# Altium PCB PCB1.PcbDoc
Units mm, origin at the board's own origin, x right, y up, seen from the top; angles counter-clockwise.
Board outline 53.21 x 63.75 mm, 2 copper layers (Top Layer, Bottom Layer); 5 components, 10 nets, 54 pads, 2 vias.
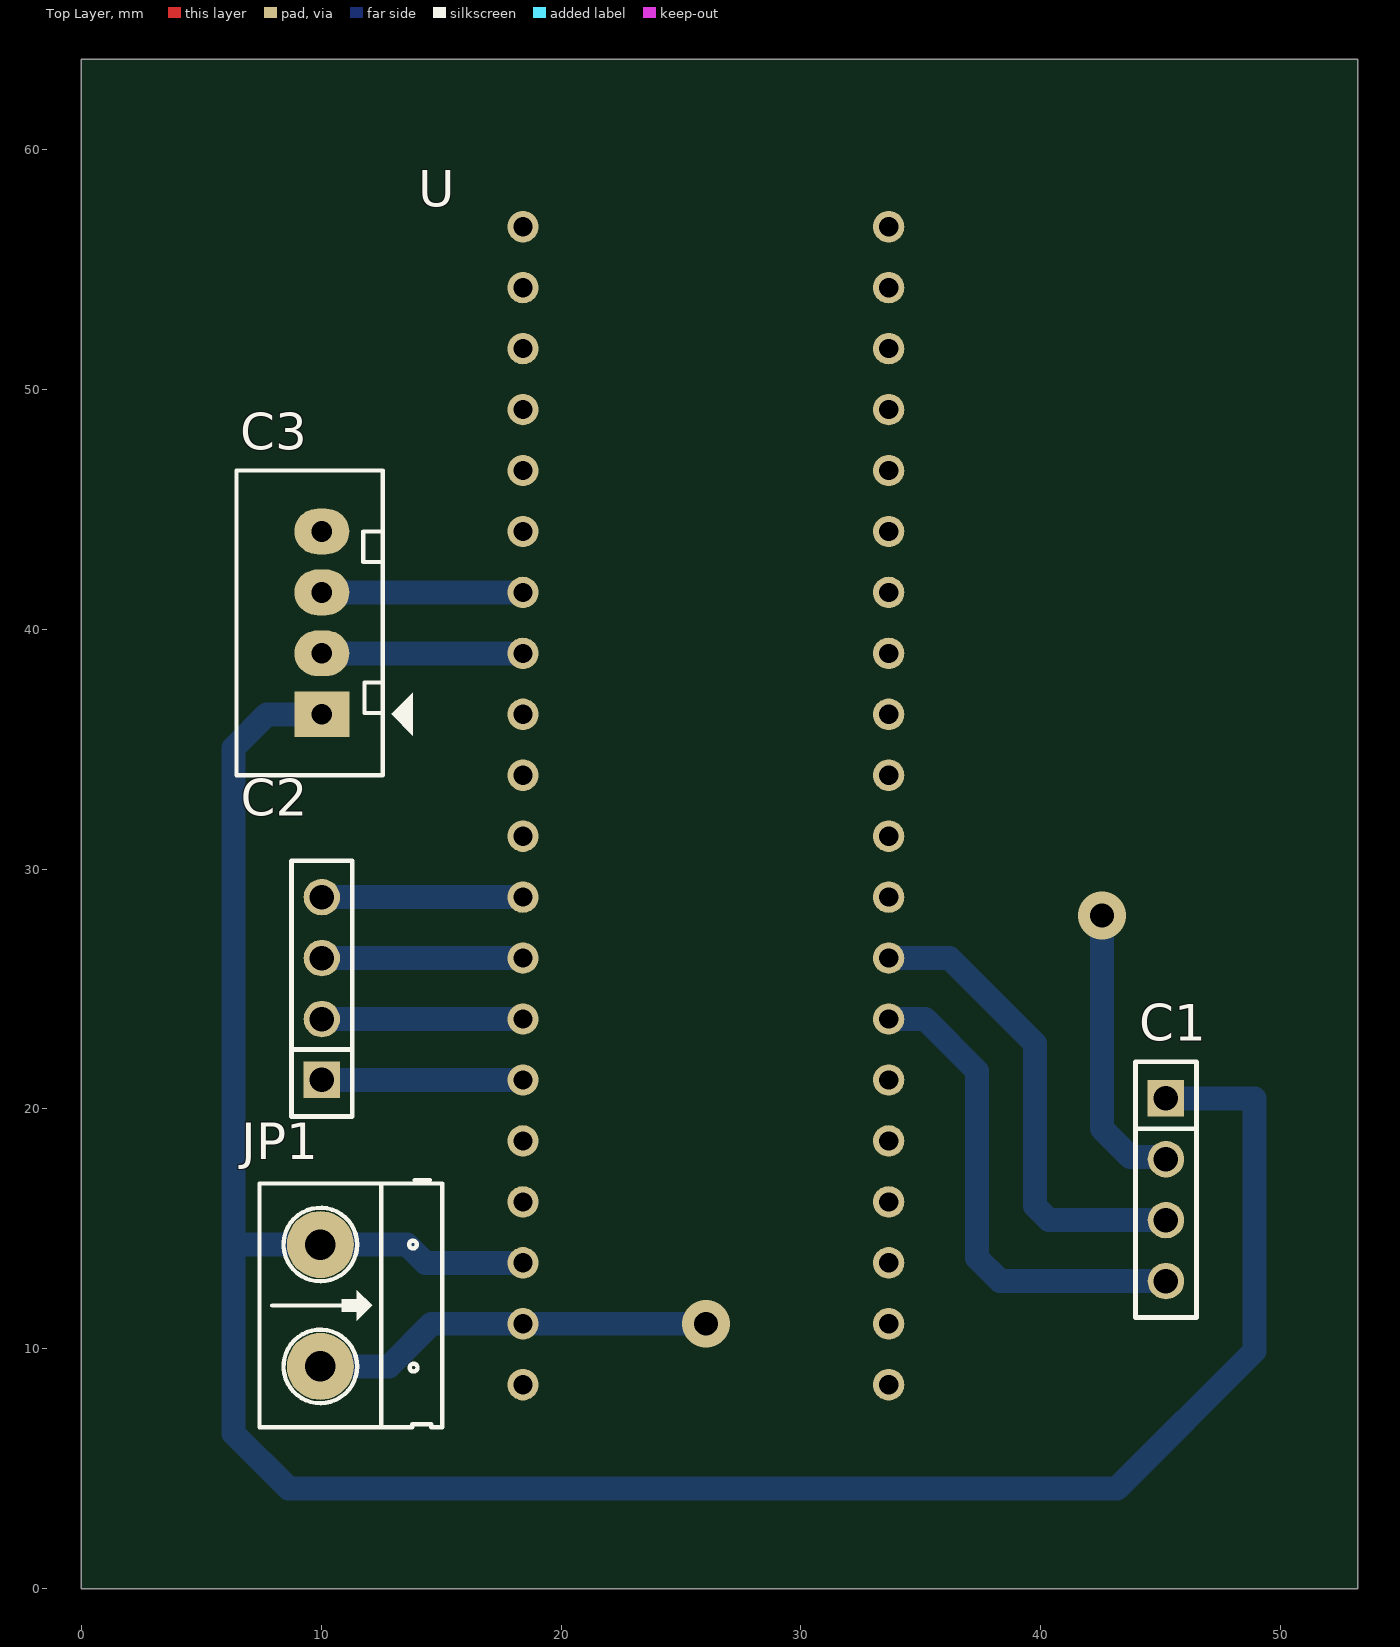
[diagram p0: Top Layer view]
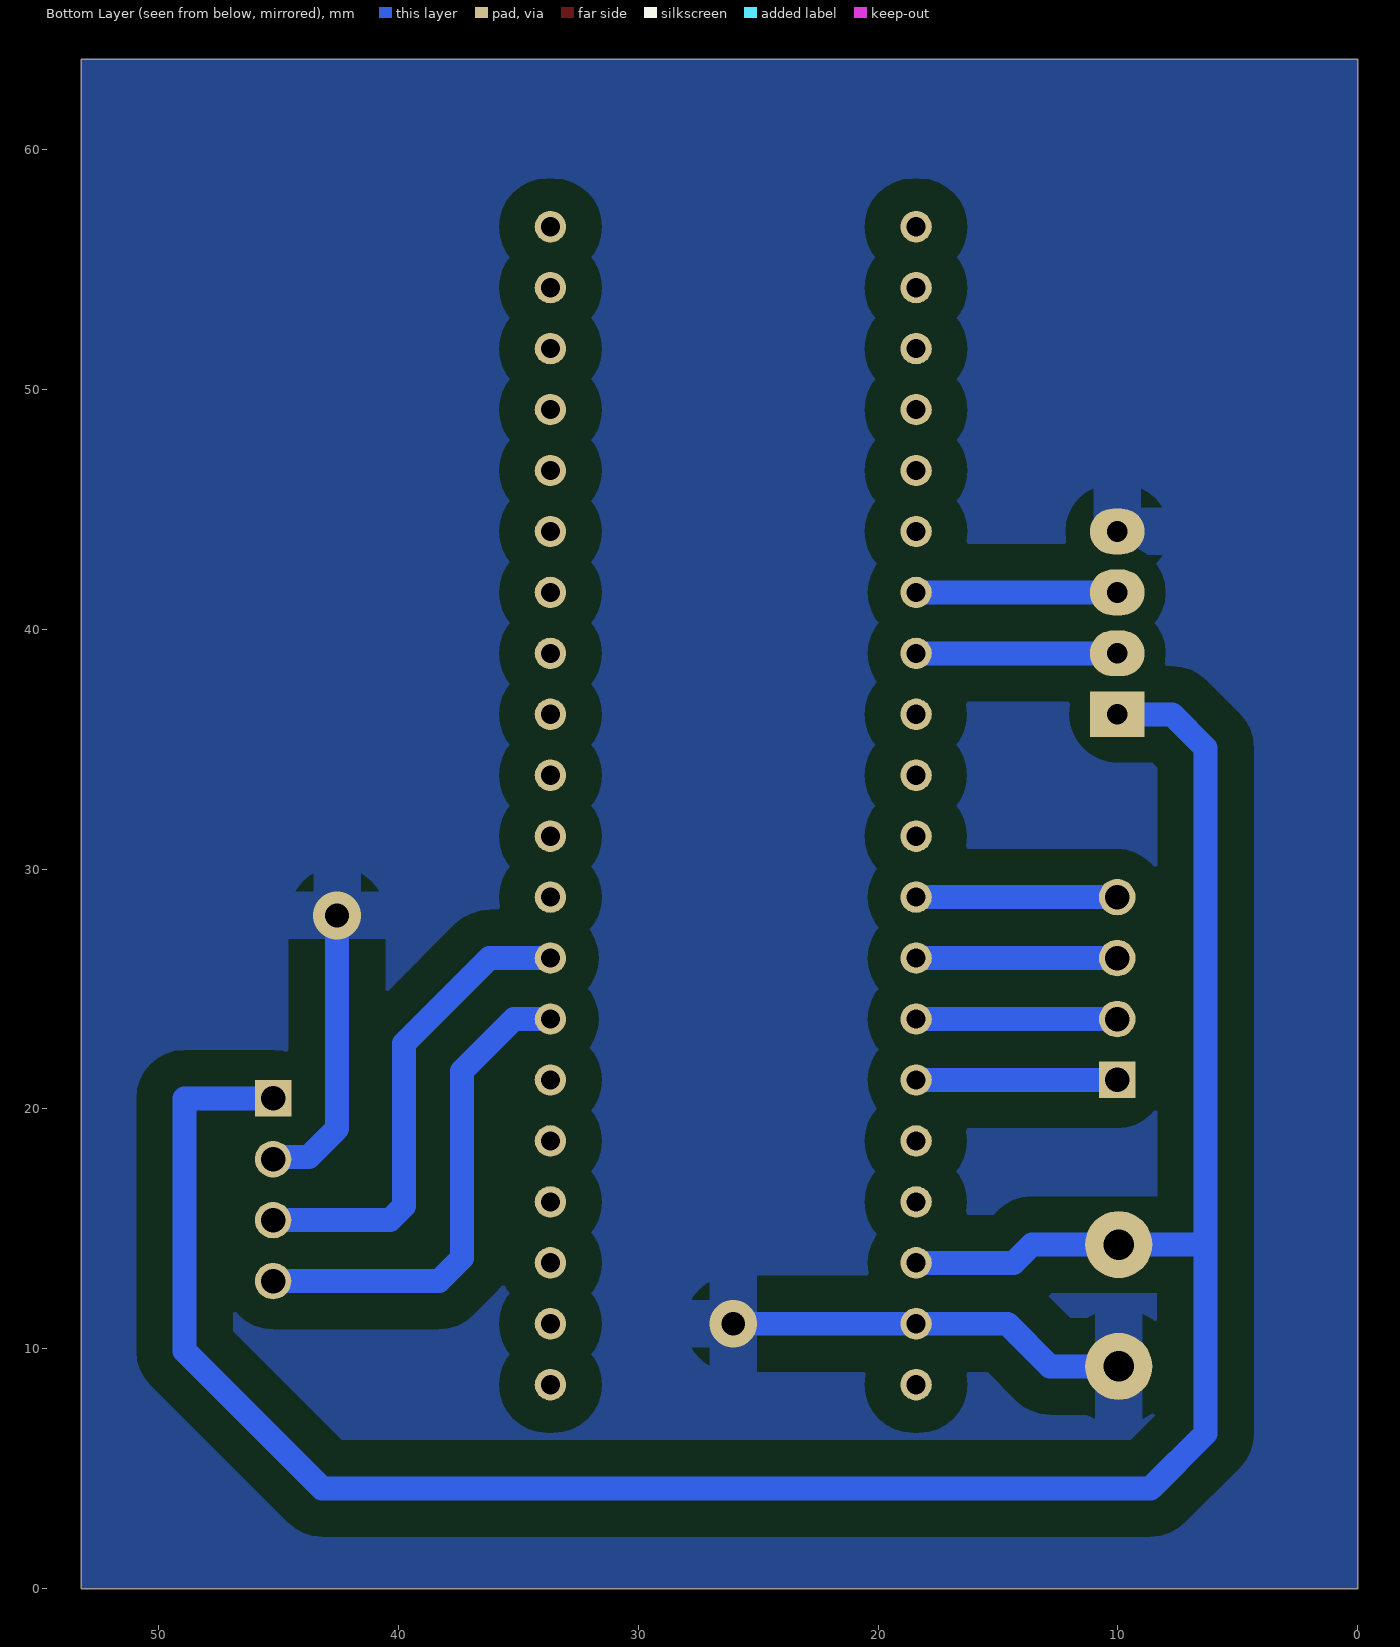
[diagram p1: Bottom Layer view, seen from below]
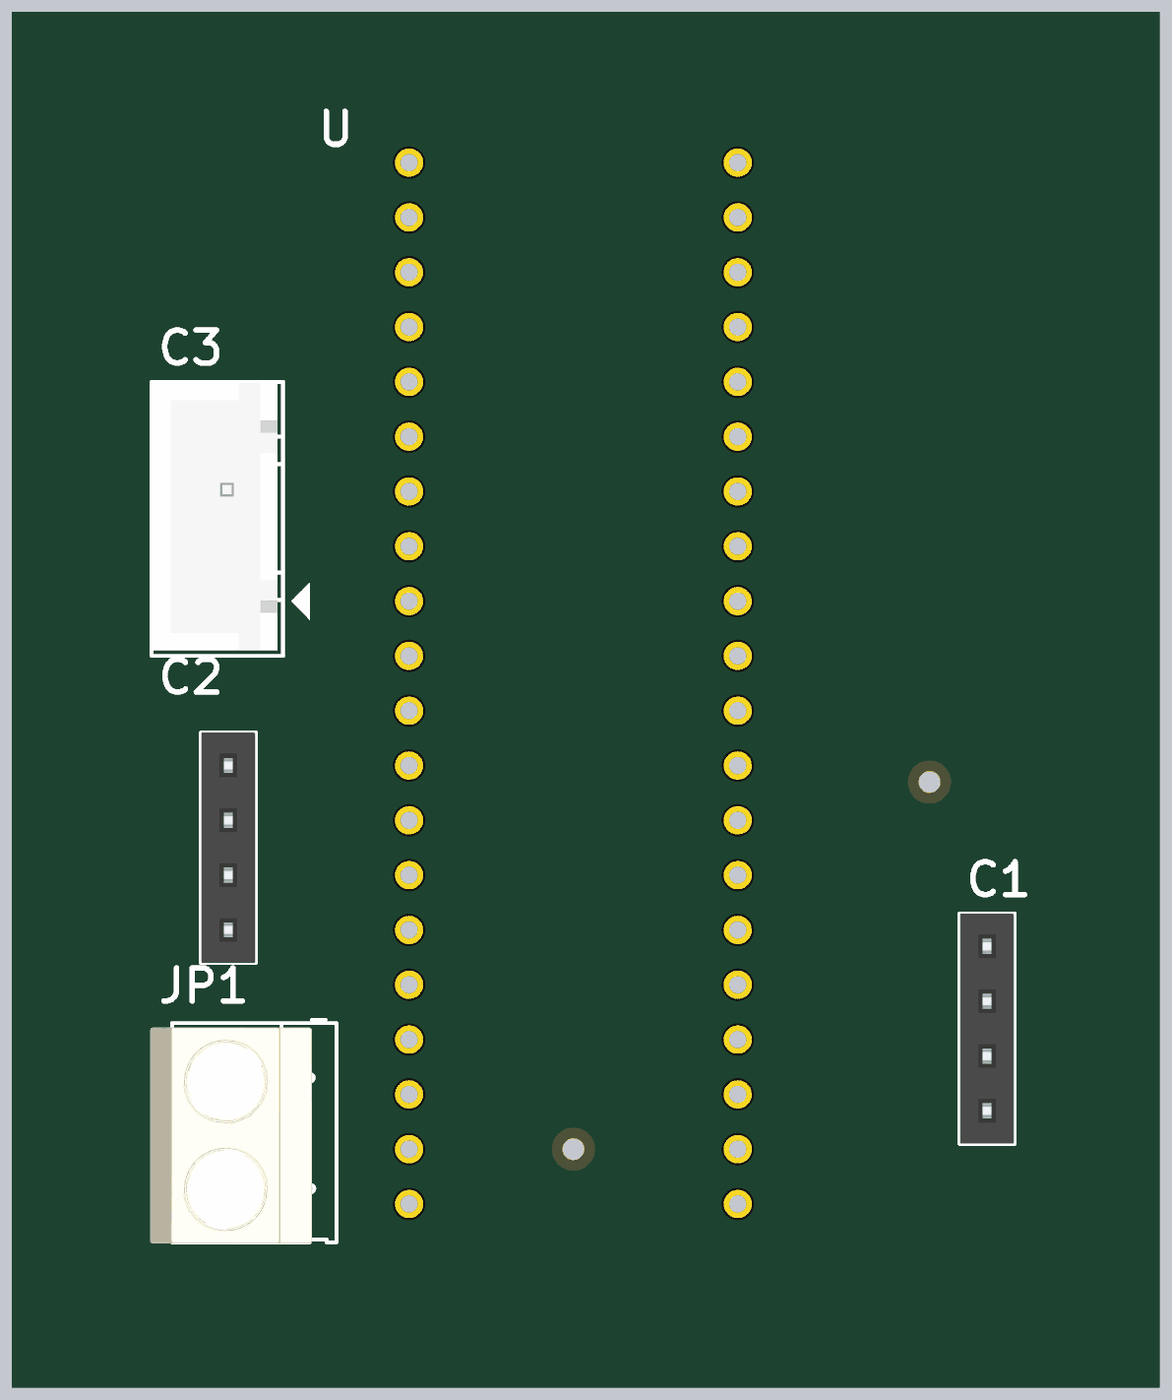
[diagram p2: 3D render of the assembled board from above, using the file's embedded part models]

## Layer stack, top to bottom
Top Solder: solder mask 0.0102, Solder Resist, Dk 3.5
Top Layer: signal copper 0.0356
Dielectric 1: dielectric 0.32, FR-4, Dk 4.8
Bottom Layer: signal copper 0.0356
Bottom Solder: solder mask 0.0102, Solder Resist, Dk 3.5

## Board outline
0,0 53.213,0 53.213,63.754 0,63.754

## Design rules (kind name [scope] priority, off if disabled: settings)
Clearance Clearance_9 [InNamedPolygon('Bottom Layer-No Net')] p1: gap=0.254 ignorepadtopadclearanceinfootprint=FALSE except(0: Arc-Hole Track-Hole SMDPad-Hole THPad-Hole Via-Hole Fill-Hole Poly-Hole Region-Hole Text-Hole; 1.5: Arc-Fill Arc-Poly Arc-Region Track-Fill Track-Poly Track-Region Via-Fill Via-Poly Via-Region Fill-Fill Fill-Poly Fill-Region Poly-Poly Poly-Region Region-Region)
Clearance Clearance_8 [InNamedPolygon('Bottom Layer-No Net')] p2: gap=0.254 ignorepadtopadclearanceinfootprint=FALSE except(0: Arc-Hole Track-Hole SMDPad-Hole THPad-Hole Via-Hole Fill-Hole Poly-Hole Region-Hole Text-Hole; 1.5: Arc-Fill Arc-Poly Arc-Region Track-Fill Track-Poly Track-Region Fill-Fill Fill-Poly Fill-Region Poly-Poly Poly-Region Region-Region)
Clearance Clearance_7 [InNamedPolygon('Bottom Layer-No Net')] p3: gap=0.254 ignorepadtopadclearanceinfootprint=FALSE except(0: Arc-Hole Track-Hole SMDPad-Hole THPad-Hole Via-Hole Fill-Hole Poly-Hole Region-Hole Text-Hole; 1.5: Arc-Fill Arc-Poly Arc-Region Track-Fill Track-Poly Track-Region Via-Fill Via-Poly Via-Region Fill-Fill Fill-Poly Fill-Region Poly-Poly Poly-Region Region-Region)
Clearance Clearance_6 [InNamedPolygon('Bottom Layer-No Net')] p4: gap=0.254 ignorepadtopadclearanceinfootprint=FALSE except(0: Arc-Hole Track-Hole SMDPad-Hole THPad-Hole Via-Hole Fill-Hole Poly-Hole Region-Hole Text-Hole; 1.5: Arc-Fill Arc-Poly Arc-Region Track-Fill Track-Poly Track-Region Via-Fill Via-Poly Via-Region Fill-Fill Fill-Poly Fill-Region Poly-Poly Poly-Region Region-Region)
Clearance Clearance_5 [InNamedPolygon('Bottom Layer-No Net')] p5: gap=0.254 ignorepadtopadclearanceinfootprint=FALSE except(0: Arc-Hole Track-Hole SMDPad-Hole THPad-Hole Via-Hole Fill-Hole Poly-Hole Region-Hole Text-Hole; 1.5: Arc-Fill Arc-Poly Arc-Region Track-Fill Track-Poly Track-Region Via-Fill Via-Poly Via-Region Fill-Fill Fill-Poly Fill-Region Poly-Poly Poly-Region Region-Region)
Clearance Clearance_4 [InNamedPolygon('Bottom Layer-No Net')] p6: gap=0.254 ignorepadtopadclearanceinfootprint=FALSE except(0: Arc-Hole Track-Hole SMDPad-Hole THPad-Hole Via-Hole Fill-Hole Poly-Hole Region-Hole Text-Hole; 0.5: Arc-Fill Arc-Poly Arc-Region Track-Fill Track-Poly Track-Region Via-Fill Via-Poly Via-Region Fill-Fill Fill-Poly Fill-Region Poly-Poly Poly-Region Region-Region)
Clearance Clearance_3 [InNamedPolygon('Bottom Layer-No Net')] p7: gap=0.254 ignorepadtopadclearanceinfootprint=FALSE except(0: Arc-Hole Track-Hole SMDPad-Hole THPad-Hole Via-Hole Fill-Hole Poly-Hole Region-Hole Text-Hole; 0.5: Arc-Fill Arc-Poly Arc-Region Track-Fill Track-Poly Track-Region Via-Fill Via-Poly Via-Region Fill-Fill Fill-Poly Fill-Region Poly-Poly Poly-Region Region-Region)
Clearance Clearance_2 [InNamedPolygon('Bottom Layer-No Net')] p8: gap=0.254 ignorepadtopadclearanceinfootprint=FALSE except(0: Arc-Hole Track-Hole SMDPad-Hole THPad-Hole Via-Hole Fill-Hole Poly-Hole Region-Hole Text-Hole; 0.5: Arc-Fill Arc-Poly Arc-Region Track-Fill Track-Poly Track-Region Via-Fill Via-Poly Via-Region Fill-Fill Fill-Poly Fill-Region Poly-Poly Poly-Region Region-Region)
Clearance Clearance_1 [InNamedPolygon('Bottom Layer-No Net')] p9: gap=0.254 ignorepadtopadclearanceinfootprint=FALSE except(0: Arc-Hole Track-Hole SMDPad-Hole THPad-Hole Via-Hole Fill-Hole Poly-Hole Region-Hole Text-Hole; 0.5: Arc-Fill Arc-Poly Arc-Region Track-Fill Track-Poly Track-Region Via-Fill Via-Poly Via-Region Fill-Fill Fill-Poly Fill-Region Poly-Poly Poly-Region Region-Region)
Clearance [All] p10: gap=0.254 ignorepadtopadclearanceinfootprint=FALSE except(0: Arc-Hole Track-Hole SMDPad-Hole THPad-Hole Via-Hole Fill-Hole Poly-Hole Region-Hole Text-Hole)
PolygonConnect PolygonConnect_11 [All vs IsNamedPolygon('Bottom Layer-No Net')] p1: connectstyle=Relief reliefconductorwidth=2 reliefentries=4 polygonreliefangle="90 Angle" airgapwidth=1
PolygonConnect PolygonConnect_10 [All vs IsNamedPolygon('Bottom Layer-No Net')] p2: connectstyle=Relief reliefconductorwidth=2 reliefentries=4 polygonreliefangle="90 Angle" airgapwidth=1
PolygonConnect PolygonConnect_9 [All vs IsNamedPolygon('Bottom Layer-No Net')] p3: connectstyle=Relief reliefconductorwidth=0.254 reliefentries=4 polygonreliefangle="90 Angle" airgapwidth=1
PolygonConnect PolygonConnect_8 [All vs IsNamedPolygon('Bottom Layer-No Net')] p4: connectstyle=Relief reliefconductorwidth=2 reliefentries=4 polygonreliefangle="90 Angle" airgapwidth=1
PolygonConnect PolygonConnect_7 [All vs IsNamedPolygon('Bottom Layer-No Net')] p5: connectstyle=Relief reliefconductorwidth=2 reliefentries=4 polygonreliefangle="90 Angle" airgapwidth=1
PolygonConnect PolygonConnect_6 [All vs IsNamedPolygon('Bottom Layer-No Net')] p6: connectstyle=Relief reliefconductorwidth=2 reliefentries=4 polygonreliefangle="90 Angle" airgapwidth=1
PolygonConnect PolygonConnect_5 [All vs IsNamedPolygon('Bottom Layer-No Net')] p7: connectstyle=Relief reliefconductorwidth=2 reliefentries=4 polygonreliefangle="90 Angle" airgapwidth=1
PolygonConnect PolygonConnect_4 [All vs IsNamedPolygon('Bottom Layer-No Net')] p8: connectstyle=Relief reliefconductorwidth=2 reliefentries=4 polygonreliefangle="90 Angle" airgapwidth=1
PolygonConnect PolygonConnect_3 [All vs IsNamedPolygon('Bottom Layer-No Net')] p9: connectstyle=Relief reliefconductorwidth=2 reliefentries=4 polygonreliefangle="90 Angle" airgapwidth=1
PolygonConnect PolygonConnect_2 [All vs IsNamedPolygon('Bottom Layer-No Net')] p10: connectstyle=Relief reliefconductorwidth=0.254 reliefentries=4 polygonreliefangle="90 Angle" airgapwidth=1
PolygonConnect PolygonConnect_1 [All vs IsNamedPolygon('Bottom Layer-No Net')] p11: connectstyle=Relief reliefconductorwidth=2 reliefentries=4 polygonreliefangle="90 Angle" airgapwidth=1
PolygonConnect [All] p12: connectstyle=Relief reliefconductorwidth=0.254 reliefentries=4 polygonreliefangle="90 Angle" airgapwidth=0.254
RoutingVias [All] p1: holewidth=0.711 width=1.27 viastyle="Through Hole" minholewidth=0.711 minwidth=1.27 maxholewidth=0.711 maxwidth=1.27
SolderMaskExpansion [All] p1: expansion=0.102
Width [All] p1: maxlimit=2 minlimit=0.254 preferedwidth=1 toplayer_maxwidth=0.254 toplayer_prefwidth=0.254 bottomlayer_minwidth=0.5 minimp=50.000000 maximp=50.000000 favimp=50.000000
30 further rules are at their usual default settings.

## Components (designator, comment, footprint, x,y, rotation, side; value= is the part's Value field where it differs from the comment)
C1 "JP4" JP4-C1T 45.212,20.447 r270 top
C2 "JP4" JP4-C1T 10.033,21.209 r90 top
C3 "Header4" Header4 10.033,36.449 r90 top
JP1 "Header 2_1" HED2 9.97,14.351 r270 top value="Header 2"
U "BLUE_PILL" BLUE_PILL 26.035,41.529 r0 top

## Footprints (in the part's own frame and the unit in brackets; to place one, negate y for a bottom-side part, rotate by r counter-clockwise, add the part's x,y. Pads: shape width x height; smd on the part's side, far side on the other; paste and mask are expansions set on the pad)
BLUE_PILL [mil]
  round 51.5 / inner round 60 / far side round 51.5 hole 31.5: P$1(-300,600) P$2(-300,500) P$3(-300,400) P$4(-300,300) P$5(-300,200) P$6(-300,100) P$7(-300,0) P$8(-300,-100) P$9(-300,-200) P$10(-300,-300) P$11(-300,-400) P$12(-300,-500) P$13(-300,-600) P$14(-300,-700) P$15(-300,-800) P$16(-300,-900) P$17(-300,-1000) P$18(-300,-1100) P$19(-300,-1200) P$20(-300,-1300) P$21(300,600) P$22(300,500) P$23(300,400) P$24(300,300) P$25(300,200) P$26(300,100) P$27(300,0) P$28(300,-100) P$29(300,-200) P$30(300,-300) P$31(300,-400) P$32(300,-500) P$33(300,-600) P$34(300,-700) P$35(300,-800) P$36(300,-900) P$37(300,-1000) P$38(300,-1100) P$39(300,-1200) P$40(300,-1300)
Header4 [mil] "CON4"
  rect 75x90 hole 34: 1(0,0)
  oval 75x90 hole 34: 2(100,0) 3(200,0) 4(300,0)
  silkscreen extent -100,-150 400,140, body extent -90,-90 398,136, height 276
HED2 [mil] "Header 2, 2 pin, hight 300mil, Pin to Pin 200, Colour Green"
  round 110 hole 50: 1(0,0) 2(200,0)
  silkscreen extent -106,-100 300,200, body extent -92,-140 302,155, height 394
JP4-C1T [mm] "4 row, straight, gold plating"
  rect 1.52x1.52 hole 1.02: 1(0,0)
  round 1.52 hole 1.02: 2(2.54,0) 3(5.08,0) 4(7.62,0)
  silkscreen extent -1.52,-1.27 9.14,1.27, body extent -1.52,-1.25 9.14,1.25, height 8.51

## Part data
C1 C2: "WR-PHD 2.54 mm Angled Socket Header", Manufacturer="Würth Elektronik eiSos GmbH", partNo=613004143121, ComponentLink1 Description=Manufacturer, ComponentLink1URL=http://www.we-online.com, ComponentLink2 Description=Datasheet, ComponentLink2URL=http://katalog.we-online.de/em/datasheet/6130xx143121.pdf, Created by="Karrer Zheng", Created Date="29 March 2013", NoPins=04
C3: "Header IDC, 4 x 1 Pin Vertical 2.54mm Pitch (Non-Boxed, Male)", Manufacturer="Würth Elektronik eiSos GmbH", partNo=613002143121, ComponentLink1 Description=Manufacturer, ComponentLink1URL=http://www.we-online.com, ComponentLink2 Description=Datasheet, ComponentLink2URL=http://katalog.we-online.de/em/datasheet/6130xx143121.pdf, Created by="Karrer Zheng", Created Date="29 March 2013", NoPins=02
JP1: "Header, 2-Pin", Manufacturer="Generic Components", Class=Connector
U: DeviceSetName=BLUE_PILL, GateName_1=G$1, LibraryName=BluePill, Package=BLUE_PILL, SymbolName_1=BLUE_PILL

## Via types
v1: diameter 2, hole 1, Top Layer to Bottom Layer, tented both sides, 2 vias

## Nets (pads, with @x,y where several pads share a name; then routed paths per layer and width w, separated by ;. In a path a pad name is that pad's centre, name@x,y a point inside that pad or via, vN(x,y) a via of type N, cw(c..) or ccw(c..) an arc to the next point about the centre after c; other vN are vias at no path point)
GND: C1.2 C3.4 JP1.2 U.P$19 | length 28.6
  Bottom Layer w1: JP1.2@9.906,9.271 12.827,9.271 14.605,11.049 U.P$19 v1(26.035,11.049) ; v1(42.545,28.067) 42.545,19.177 43.725,17.997 44.741,17.997 C1.2@44.831,17.907
NetC1_1: C1.1 C3.1 JP1.1 U.P$18 | length 105.3
  Bottom Layer w1: C3.1 7.747,36.449 6.35,35.052 6.35,14.351 ; U.P$18 14.351,13.589 13.589,14.351 6.35,14.351 ; C1.1 48.895,20.447 48.895,9.906 43.18,4.191 8.636,4.191 6.35,6.477 6.35,14.351
NetC1_3: C1.3 U.P$33 | length 20.1
  Bottom Layer w1: U.P$33 36.195,26.289 39.751,22.733 39.751,15.953 40.337,15.367 C1.3
NetC1_4: C1.4 U.P$34 | length 20.6
  Bottom Layer w1: U.P$34 35.179,23.749 37.338,21.59 37.338,13.794 38.305,12.827 C1.4
NetC2_1: C2.1 U.P$15 | length 8.4
  Bottom Layer w1: C2.1 U.P$15
NetC2_2: C2.2 U.P$14 | length 8.4
  Bottom Layer w1: C2.2 U.P$14
NetC2_3: C2.3 U.P$13 | length 8.4
  Bottom Layer w1: C2.3 U.P$13
NetC2_4: C2.4 U.P$12 | length 8.4
  Bottom Layer w1: C2.4 U.P$12
NetC3_2: C3.2 U.P$8 | length 8.4
  Bottom Layer w1: C3.2 U.P$8
NetC3_3: C3.3 U.P$7 | length 8.4
  Bottom Layer w1: C3.3 U.P$7
pads on no net: U.P$1 U.P$2 U.P$3 U.P$4 U.P$5 U.P$6 U.P$9 U.P$10 U.P$11 U.P$16 U.P$17 U.P$20 U.P$21 U.P$22 U.P$23 U.P$24 U.P$25 U.P$26 U.P$27 U.P$28 U.P$29 U.P$30 U.P$31 U.P$32 U.P$35 U.P$36 U.P$37 U.P$38 U.P$39 U.P$40
copper on no net: | length 9.2
  Bottom Layer w1: 18.288,8.509 18.542,8.509 ; 18.288,16.129 18.542,16.129 ; 18.288,18.669 18.542,18.669 ; 18.288,31.369 18.542,31.369 ; 18.288,33.909 18.542,33.909 ; 18.288,36.449 18.542,36.449 ; 18.288,44.069 18.542,44.069 ; 18.288,46.609 18.542,46.609 ; 18.288,49.149 18.542,49.149 ; 18.288,51.689 18.542,51.689 ; 18.288,54.229 18.542,54.229 ; 18.288,56.769 18.542,56.769 ; 18.332,56.769 18.415,56.769 ; 33.528,8.509 33.782,8.509 ; 33.528,31.369 33.782,31.369 ; 33.528,33.909 33.782,33.909 ; 33.528,36.449 33.782,36.449 ; 33.528,38.989 33.782,38.989 ; 33.528,41.529 33.782,41.529 ; 33.528,44.069 33.782,44.069 ; 33.528,46.609 33.782,46.609 ; 33.528,49.149 33.782,49.149 ; 33.528,51.689 33.782,51.689 ; 33.528,54.229 33.782,54.229 ; 33.528,56.769 33.782,56.769 ; 33.528,11.049 33.782,11.049 33.528,11.049 ; 33.528,13.589 33.782,13.589 33.528,13.589 ; 33.528,16.129 33.782,16.129 33.528,16.129 ; 33.528,18.669 33.782,18.669 33.528,18.669 ; 33.528,21.209 33.782,21.209 33.528,21.209 ; 33.528,28.829 33.782,28.829 33.528,28.829

## Polygon pours and split planes (outlines as drawn)
GND on Bottom Layer "Bottom Layer-No Net" (solid, pour order 44): 53.213,0 53.213,63.754 0,63.754 0,0